# Altium PCB ESC.PcbDoc (part 2 of 2)
Units mm, origin at the board's own origin, x right, y up, seen from the top; angles counter-clockwise.
Board outline 33 x 33 mm, 4 copper layers (Top Layer, Layer 2, Layer 3, Bottom Layer), stack 0.603 mm thick; 138 components, 119 nets, 637 pads, 195 vias.
Unrouted connection lines stored in the file: 127.
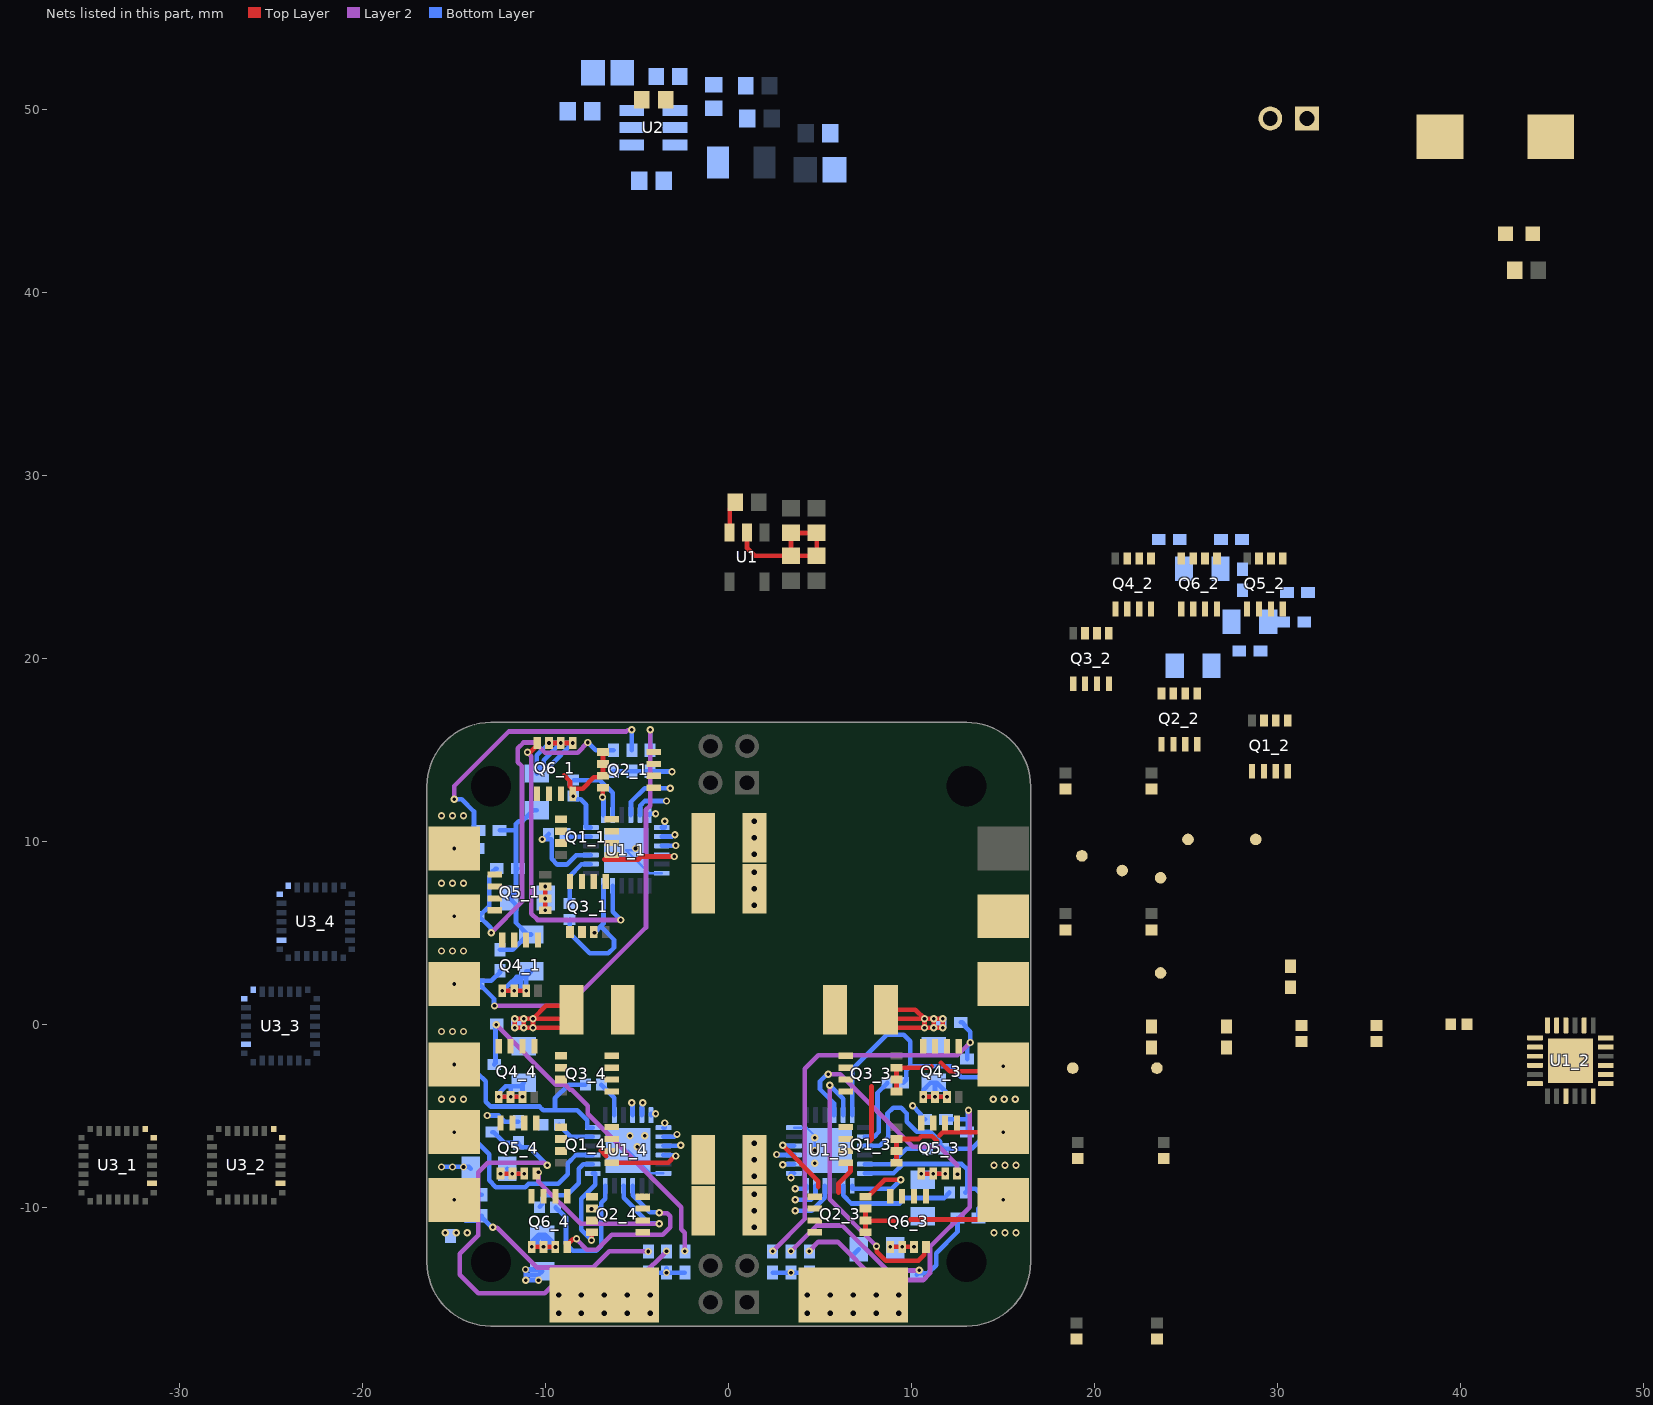
[diagram p4: the nets of this part, all layers, seen from the top]

## Via types
v1: diameter 0.4, hole 0.2, Top Layer to Bottom Layer, tented both sides, 163 vias
v2: diameter 0.55, hole 0.3, Top Layer to Bottom Layer, tented both sides, 32 vias

## Nets (pads, with @x,y where several pads share a name; then routed paths per layer and width w, separated by ;. In a path a pad name is that pad's centre, name@x,y a point inside that pad or via, vN(x,y) a via of type N, cw(c..) or ccw(c..) an arc to the next point about the centre after c; other vN are vias at no path point) (continued)
G2_L_3: Q5_3.4 U1_3.10 | length 12.4
  Top Layer w0.254: Q5_3.4@12.475,-8.17 12.5,-8.195 v1(12.5,-8.2)
  Layer 2 w0.254: v1(5.437,-2.737) 6.091,-2.737 10.055,-6.7 11.5,-6.7 12.472,-7.672 12.472,-8.172 v1(12.5,-8.2)
  Bottom Layer w0.254: v1(5.437,-2.737) 5.397,-2.737 5.329,-2.805 5.294,-2.805 4.985,-3.114 4.985,-3.55 5.75,-4.315 U1_3.10@5.75,-4.965
G2_L_4: Q5_4.4 U1_4.10 | length 11.4
  Top Layer w0.254: Q5_4.4@-10.525,-8.17 -10.455,-8.1 v1(-10.4,-8.1)
  Layer 2 w0.254: v1(-10.4,-8.1) -10.4,-8.6 -8.1,-10.9 v1(-3.8,-10.9)
  Bottom Layer w0.254: U1_4.10@-5.75,-8.835 -5.742,-8.843 -5.742,-9.493 -4.363,-10.872 -3.828,-10.872 v1(-3.8,-10.9)
G3_H_1: Q2_1.4 U1_1.19 | length 1.5
  Top Layer w0.254: v1(-6.9,12.4) -6.885,12.415 -6.885,12.91 Q2_1.4@-6.87,12.925
  Bottom Layer w0.254: v1(-6.9,12.4) -6.9,12.36 -6.85,12.31 U1_1.19@-6.85,11.435
G3_H_2: Q2_2.4 U1_2.13
G3_H_3: Q2_3.4 U1_3.19 | length 5.3
  Top Layer w0.254: Q2_3.4@7.47,-9.425 7.59,-9.425 8.515,-8.5 v1(9.4,-8.5)
  Bottom Layer w0.254: U1_3.19@6.75,-8.835 6.75,-9 8.9,-9 v1(9.4,-8.5)
G3_H_4: Q2_4.4 U1_4.13 | length 4.8
  Top Layer w0.254: v1(-7.5,-11.8) -7.485,-11.785 -7.485,-11.39 Q2_4.4@-7.47,-11.375
  Bottom Layer w0.254: v1(-7.5,-11.8) -8.067,-11.233 -8.067,-9.545 -7.304,-8.782 -7.304,-8.158 -7.312,-8.15 U1_4.13@-7.435,-8.15
G3_L_1: Q6_1.4 U1_1.11 | length 16.8
  Top Layer w0.254: v1(-10.997,14.869) -10.969,14.897 -10.828,14.897 -10.475,15.25 Q6_1.4@-10.475,15.37
  Layer 2 w0.254: v1(-10.997,14.869) -10.997,14.845 -10.8,14.647 -10.8,6.047 -10.451,5.698 -5.902,5.698 v1(-5.9,5.7)
  Bottom Layer w0.254: U1_1.11@-6.35,7.565 -6.35,6.15 v1(-5.9,5.7)
G3_L_2: Q6_2.4 U1_2.9
G3_L_3: Q6_3.4 U1_3.11 | length 15.5
  Top Layer w0.254: v1(8.073,-12.127) 8.083,-12.138 8.083,-12.431 8.583,-12.93 10.367,-12.93 10.692,-12.605 10.692,-12.253 Q6_3.4@10.775,-12.17
  Layer 2 w0.254: v1(5.512,-3.332) 5.512,-9.567 v1(8.073,-12.127)
  Bottom Layer w0.254: v1(5.512,-3.332) 6.25,-4.07 U1_3.11@6.25,-4.965
G3_L_4: Q6_4.4 U1_4.9 | length 10.3
  Top Layer w0.254: Q6_4.4@-8.825,-12.17 -8.825,-12.05 -8.526,-11.751 -8.351,-11.751 v1(-8.323,-11.723)
  Layer 2 w0.254: v1(-8.323,-11.723) -8.323,-11.762 -7.758,-12.327 -7.227,-12.327 -6.4,-11.5 -3.6,-11.5 -3.2,-11.1 -3.2,-10.5 -3.372,-10.328 -3.772,-10.328 v1(-3.8,-10.3)
  Bottom Layer w0.254: U1_4.9@-5.25,-8.835 -5.242,-8.843 -5.242,-9.351 -4.321,-10.272 -3.828,-10.272 v1(-3.8,-10.3)
GND: C1.2 C2.1 C3.1 C4.1 C5.1 C6.1 C7.2 C8.2 C9.1 C12.1 C13.1 C14.1 C15.2 C16_1.1 C16_2.1 C16_3.1 C16_4.1 C17_1.1 C17_2.1 C17_3.1 C17_4.1 C18.1 C19.1 D1.2 P1.1 pad.2@6.8,-14.8 R1_1.1 R1_2.1 R1_3.1 R1_4.1 R2_1.1 R2_2.1 R2_3.1 R2_4.1 R3_1.1 R3_2.1 R3_3.1 R3_4.1 R6.1 R10_1.1 R10_2.1 R10_3.1 R10_4.1 R11_1.1 R11_2.1 R11_3.1 R11_4.1 R12_1.1 R12_2.1 R12_3.1 R12_4.1 U1.2 U1_1.6 U1_1.25 U1_2.6 U1_2.25 U1_3.6 U1_3.25 U1_4.6 U1_4.25 U2.1 U3_1.16 U3_2.16 U3_3.16 U3_4.16 | length 59.4
  Top Layer w0.254: U1.2@1,26.875 1,26.025 1.425,25.6 C9.1@3.4,25.6 ; v2(1.4,-8.3) v2(1.4,-7.4) v2(1.4,-6.5) ; v1(-11.2,-0.2) v1(-11.2,0.3) ; v1(-11.2,-0.2) v1(-10.7,-0.2) ; v1(-11.2,-0.2) v1(-11.7,-0.2) v1(-11.7,0.3) v1(-11.2,0.3) ; v1(-11.2,0.3) v1(-10.7,0.3) ; v1(-10.7,-0.2) -9.123,-0.2 -8.6,0.323 C18.1@-8.6,0.8 ; v1(-10.7,-0.2) v1(-10.7,0.3) ; v1(-10.7,0.3) -9.1,0.3 C18.1@-8.6,0.8 ; v1(-10.7,0.3) -10,1 -8.8,1 C18.1@-8.6,0.8 ; C9.1@3.4,25.6 C6.1@3.4,26.85 C7.2@4.8,26.85 C8.2@4.8,25.6 C9.1@3.4,25.6 ; C19.1@8.6,0.8 10.2,0.8 v1(10.7,0.3) ; C19.1@8.6,0.8 8.6,0.323 9.123,-0.2 v1(10.7,-0.2) ; C19.1@8.6,0.8 9.1,0.3 v1(10.7,0.3) ; v1(10.7,-0.2) v1(10.7,0.3) ; v1(10.7,-0.2) v1(11.2,-0.2) ; v1(10.7,0.3) v1(11.2,0.3) ; v1(11.2,-0.2) v1(11.7,-0.2) v1(11.7,0.3) v1(11.2,0.3) ; v1(11.2,-0.2) v1(11.2,0.3)
  Bottom Layer w0.127: U1_4.25@-5.5,-6.9 -4.259,-8.141 -3.574,-8.141 U1_4.6@-3.565,-8.15 ; v1(-5.1,9.6) -5.2,9.5 U1_1.25@-5.6,9.5 -4.359,8.259 -3.674,8.259 U1_1.6@-3.665,8.25 ; U1_3.6@3.565,-5.65 3.574,-5.659 4.259,-5.659 4.7,-6.1 v1(4.7,-6.2) ; U1_3.25@4.616,-6.284 4.7,-6.367 v1(4.7,-6.9)
  Bottom Layer w0.254: v1(-15.7,-7.8) v1(-15.1,-7.8) v1(-14.5,-7.8) -14.2,-7.8 R2_4.1@-14.1,-7.9 ; v1(-13.2,-4.988) -12.585,-4.988 -12.248,-5.325 R11_4.1@-11.5,-5.325 ; R12_1.1@-12.525,10.6 -11.625,10.6 ; R10_1.1@-12.5,4.075 -11.8,4.075 R1_1.1@-10.975,4.9 ; R11_1.1@-11.625,8.5 -11.625,10.6 ; R11_1.1@-11.525,8.5 -11.625,8.4 -11.625,7.597 -11.627,7.595 -11.627,7.273 R2_1.1@-12,6.9 -11.627,6.527 -11.627,5.552 R1_1.1@-10.975,4.9 ; R1_1.1@-10.8,4.9 R1_1.1@-10.975,4.9 ; R3_1.1@-10.5,11.7 -10.675,11.7 -11.276,11.099 -11.476,11.099 -11.625,10.95 -11.625,10.6 ; v1(-10.4,-14) v1(-11.1,-14) -11.105,-13.995 -11.105,-13.705 ; R3_3.1@6.8,-12.7 6.8,-12.6 R3_3.1@7.1,-12.3 ; v1(10.047,-4.456) 10.477,-4.886 10.477,-5.027 10.65,-5.2 R11_3.1@10.725,-5.2 ; -11.105,-13.705 -11.105,-13.415 v1(-11.11,-13.41) -10.29,-13.41 R3_4.1@-10.2,-13.5 -10.405,-13.705 -11.105,-13.705
  other v1: -15.5,-11.4 -14.9,-11.4 -14.3,-11.4 14.5,-11.4 15.1,-11.4 15.7,-11.4 14.5,-7.7 15.1,-7.7 15.7,-7.7 4.7,-7.6 -5,-6.7 -5.4,-6.1 -4.6,-6.1 -15.7,-4.1 -15.1,-4.1 -14.5,-4.1 14.46,-4.1 15.06,-4.1 15.66,-4.1 -15.7,-0.4 -15.1,-0.4 -14.5,-0.4 -15.7,4 -15.1,4 -14.5,4 -15.7,7.7 -15.1,7.7 -14.5,7.7 -15.7,11.4 -15.1,11.4 -14.5,11.4
  other v2: 4.3,-15.8 5.55,-15.8 6.8,-15.8 8.05,-15.8 9.3,-15.8 4.3,-14.8 5.55,-14.8 6.8,-14.8 8.05,-14.8 9.3,-14.8 1.4,-11.1 1.4,-10.2 1.4,-9.3 1.4,6.5 1.4,7.4 1.4,8.3 1.4,9.3 1.4,10.2 1.4,11.1
NetC1_1_1: C1_1.1 U1_1.14 | length 2.9
  Bottom Layer w0.254: C1_1.1@-8.7,6.6 -8.7,8.093 -8.051,8.742 -7.543,8.742 U1_1.14@-7.535,8.75
NetC1_2_1: C1_2.1 U1_2.20
NetC1_3_1: C1_3.1 U1_3.14 | length 3.8
  Bottom Layer w0.254: U1_3.14@7.435,-6.15 7.443,-6.142 7.951,-6.142 8.2,-5.893 8.2,-4.867 8.128,-4.794 8.128,-3.752 8.66,-3.22 C1_3.1@8.66,-3.2
NetC1_4_1: C1_4.1 U1_4.20 | length 2
  Bottom Layer w0.254: C1_4.1@-6.96,-3.3 -6.96,-3.32 -6.25,-4.03 U1_4.20@-6.25,-4.965
NetC2_1_1: C2_1.1 U1_1.17 | length 1.5
  Bottom Layer w0.254: C2_1.1@-8.96,10.4 -8.81,10.25 U1_1.17@-7.535,10.25
NetC2_2_1: C2_2.1 U1_2.17
NetC2_3_1: C2_3.1 U1_3.17 | length 3.8
  Bottom Layer w0.254: U1_3.17@7.435,-7.65 8.863,-7.65 9.713,-6.8 C2_3.1@10.86,-6.8
NetC2_4_1: C2_4.1 U1_4.17 | length 2.1
  Bottom Layer w0.254: C2_4.1@-9.26,-5.5 -9.26,-5.52 -8.63,-6.15 U1_4.17@-7.435,-6.15
NetC3_1_1: C3_1.1 U1_1.20 | length 3.6
  Bottom Layer w0.254: C3_1.1@-8.48,13.34 -7.04,13.34 -6.35,12.65 U1_1.20@-6.35,11.435
NetC3_2_1: C3_2.1 U1_2.14
NetC3_3_1: C3_3.1 U1_3.20 | length 6.8
  Bottom Layer w0.254: U1_3.20@6.25,-8.835 6.258,-8.843 6.258,-9.351 6.705,-9.798 9.335,-9.798 9.633,-9.5 11.78,-9.5 12.06,-9.22 C3_3.1@12.06,-9.2
NetC3_4_1: C3_4.1 U1_4.14 | length 4.5
  Bottom Layer w0.254: C3_4.1@-10.336,-9.976 -10.187,-9.827 -10.187,-9.502 -10.039,-9.353 -8.853,-9.353 -8.192,-8.692 -8.192,-7.899 -7.951,-7.658 -7.443,-7.658 U1_4.14@-7.435,-7.65
NetC10_1: C10.1 L1.1 U2.2
NetC10_2: C10.2 U2.6
NetC11_1: C11.1 R3.1 R5.2 R6.2
NetD1_1: D1.1 R1.2
NetQ4_1_1: Q4_1.1 Q4_1.2 Q4_1.3 R1_1.2 | length 8.2
  Top Layer w0.254: v1(-12.375,1.83) v1(-11.725,1.83) v1(-11.075,1.83)
  Bottom Layer w0.254: v1(-12.375,1.83) v1@-12.335,1.83 ; R1_1.2@-11.075,2.9 R1_1.2@-11.075,2.8 ; v1@-12.335,1.83 v1(-11.725,1.83) ; v1@-12.335,1.83 -11.988,2.178 ; -11.988,2.178 -11.6,2.565 -11.6,2.6 R1_1.2@-11.275,2.6 ; -11.988,2.178 -11.697,2.178 ; v1(-11.725,1.83) -11.354,1.83 ; v1(-11.725,1.83) -11.697,1.858 -11.697,2.178 ; -11.697,2.178 R1_1.2@-11.348,2.527 ; -11.354,1.83 v1(-11.075,1.83) R1_1.2@-11.075,2.625 ; -11.354,1.83 -11.354,2.346 -11.348,2.352 R1_1.2@-11.348,2.527 ; R1_1.2@-11.348,2.527 R1_1.2@-11.275,2.6 ; R1_1.2@-11.275,2.6 -11.1,2.6 R1_1.2@-11.075,2.625 ; R1_1.2@-11.275,2.6 R1_1.2@-11.075,2.8 ; R1_1.2@-11.075,2.625 R1_1.2@-11.075,2.8 ; R1_1.2@-11.075,2.625 R1_1.2@-10.8,2.9 -10.975,2.9 R1_1.2@-11.075,2.8
NetQ4_2_1: Q4_2.1 Q4_2.2 Q4_2.3 R1_2.2
NetQ4_3_1: Q4_3.1 Q4_3.2 Q4_3.3 R1_3.2 | length 5.7
  Top Layer w0.254: v1(10.625,-3.97) v1(11.275,-3.97) v1(11.925,-3.97)
  Bottom Layer w0.254: R1_3.2@11.2,-3.2 11.375,-3.2 11.897,-3.722 11.897,-3.942 v1(11.925,-3.97) v1(11.275,-3.97) ; R1_3.2@11.2,-3.2 11.025,-3.2 10.652,-3.573 10.652,-3.943 v1(10.625,-3.97) v1(11.275,-3.97) ; R1_3.2@11.2,-3.2 11.275,-3.275 v1(11.275,-3.97)
NetQ4_4_1: Q4_4.1 Q4_4.2 Q4_4.3 R1_4.2 | length 5.7
  Top Layer w0.254: v1(-12.575,-3.97) v1(-11.925,-3.97) v1(-11.275,-3.97)
  Bottom Layer w0.254: R1_4.2@-11.2,-3.2 R1_4.2@-11.275,-3.275 ; v1(-11.925,-3.97) v1(-12.575,-3.97) -12.547,-3.942 -12.547,-3.747 -12.2,-3.4 -11.9,-3.4 ; v1(-11.925,-3.97) v1(-11.275,-3.97) R1_4.2@-11.275,-3.275 ; v1(-11.925,-3.97) -11.925,-3.425 -11.9,-3.4 ; -11.9,-3.4 -11.4,-3.4 R1_4.2@-11.275,-3.275
NetQ5_1_1: Q5_1.1 Q5_1.2 Q5_1.3 R2_1.2 | length 1.3
  Top Layer w0.254: v1(-10.03,6.225) v1(-10.03,6.875) v1(-10.03,7.525)
NetQ5_2_1: Q5_2.1 Q5_2.2 Q5_2.3 R2_2.2
NetQ5_3_1: Q5_3.1 Q5_3.2 Q5_3.3 R2_3.2 | length 2.6
  Top Layer w0.254: v1(10.525,-8.17) v1(11.175,-8.17) v1(11.825,-8.17)
  Bottom Layer w0.254: v1(10.525,-8.17) v1(11.175,-8.17) v1(11.825,-8.17)
NetQ5_4_1: Q5_4.1 Q5_4.2 Q5_4.3 R2_4.2 | length 2.3
  Top Layer w0.254: v1(-12.475,-8.17) v1(-11.825,-8.17) v1(-11.175,-8.17)
  Bottom Layer w0.254: R2_4.2@-12.1,-7.9 -11.83,-8.17 v1(-11.175,-8.17)
NetQ6_1_1: Q6_1.1 Q6_1.2 Q6_1.3 R3_1.2 | length 9.3
  Top Layer w0.254: v1(-9.825,15.37) v1(-9.175,15.37) v1(-8.525,15.37)
  Bottom Layer w0.254: R3_1.2@-10.5,14.045 R3_1.2@-10.155,14.045 ; R3_1.2@-10.5,14.045 R3_1.2@-10.5,13.7 R3_1.2@-10.155,14.045 ; R3_1.2@-10.5,14.045 -10.5,14.695 v1(-9.825,15.37) v1(-9.175,15.37) ; R3_1.2@-10.155,14.045 -10.141,14.045 R3_1.2@-10.113,14.073 ; R3_1.2@-10.155,14.045 -10.127,14.073 R3_1.2@-10.113,14.073 ; R3_1.2@-10.113,14.073 -9.827,14.073 -9.8,14.1 -9.795,14.1 v1(-8.525,15.37) v1(-9.175,15.37) ; R3_1.2@-10.113,14.073 -10.113,14.432 v1(-9.175,15.37)
NetQ6_2_1: Q6_2.1 Q6_2.2 Q6_2.3 R3_2.2
NetQ6_3_1: Q6_3.1 Q6_3.2 Q6_3.3 R3_3.2 | length 1.4
  Top Layer w0.254: Q6_3.1@8.825,-12.29 v1(8.825,-12.17) v1(9.475,-12.17) v1(10.125,-12.17)
NetQ6_4_1: Q6_4.1 Q6_4.2 Q6_4.3 R3_4.2 | length 7
  Top Layer w0.254: v1(-10.775,-12.17) v1(-10.125,-12.17) Q6_4.3@-9.475,-12.17 ; v1(-9.468,-12.177) Q6_4.3@-9.475,-12.17 ; v1(-9.468,-12.177) Q6_4.3@-9.475,-12.17
  Bottom Layer w0.254: v1(-9.468,-12.177) v1@-9.472,-12.174 ; -10.45,-12.17 -10.45,-11.75 R3_4.2@-10.2,-11.5 ; -10.45,-12.17 v1(-10.125,-12.17) ; -10.45,-12.17 v1(-10.775,-12.17) -10.748,-12.143 -10.748,-11.873 -10.375,-11.5 R3_4.2@-10.2,-11.5 ; R3_4.2@-10.2,-11.5 R3_4.2@-10.169,-11.5 ; R3_4.2@-10.2,-11.5 -10.125,-11.575 v1(-10.125,-12.17) ; R3_4.2@-10.169,-11.5 -10.025,-11.5 -9.496,-12.029 -9.496,-12.149 v1@-9.472,-12.174 ; R3_4.2@-10.169,-11.5 -9.796,-11.873 -9.796,-12.174 ; v1(-10.125,-12.17) -10.121,-12.174 -9.796,-12.174 ; -9.796,-12.174 v1@-9.472,-12.174
NetR2_1: R2.1 U1.3 | length 1.8
  Top Layer w0.254: U1.3@0.05,26.875 0.05,28.175 0.35,28.475 R2.1@0.35,28.525
NetR4_1: R4.1 U2.5
NetR5_1: R5.1 U2.4
NetU1_1_1: U1_1.1 | length 0.5
  Bottom Layer w0.254: U1_1.1@-3.665,10.75 -3.508,10.75 -3.5,10.758 v1(-3.5,11.1)
NetU1_1_2: U1_1.2 | length 0.8
  Bottom Layer w0.254: U1_1.2@-3.665,10.25 -3.657,10.258 -3.087,10.258 -2.983,10.362 v1(-2.943,10.362)
NetU1_1_3: U1_1.3 | length 0.8
  Bottom Layer w0.254: U1_1.3@-3.665,9.75 -3.658,9.757 -2.904,9.757 v1(-2.897,9.764)
NetU1_1_22: U1_1.22 | length 3.2
  Bottom Layer w0.254: U1_1.22@-5.35,11.435 -5.342,11.443 -5.342,12.158 -4.6,12.9 v1(-3.2,12.9)
NetU1_1_23: U1_1.23 | length 2.1
  Bottom Layer w0.254: U1_1.23@-4.85,11.435 -4.842,11.443 -4.842,11.951 -4.593,12.2 v1(-3.4,12.2)
NetU1_1_24: U1_1.24 | length 0.4
  Bottom Layer w0.254: U1_1.24@-4.35,11.435 -4.35,11.492 -4.342,11.5 v1(-4,11.5)
NetU1_2_1: U1_2.1
NetU1_2_2: U1_2.2
NetU1_2_3: U1_2.3
NetU1_2_22: U1_2.22
NetU1_2_23: U1_2.23
NetU1_2_24: U1_2.24
NetU1_3_1: U1_3.1 | length 0.4
  Bottom Layer w0.254: v1(3.4,-8.4) 3.4,-8.158 3.408,-8.15 U1_3.1@3.565,-8.15
NetU1_3_2: U1_3.2 | length 0.6
  Bottom Layer w0.254: v1(2.945,-7.677) 2.964,-7.658 3.557,-7.658 U1_3.2@3.565,-7.65
NetU1_3_3: U1_3.3 | length 1
  Bottom Layer w0.254: v1(2.614,-7.123) 2.641,-7.15 U1_3.3@3.565,-7.15
NetU1_3_22: U1_3.22 | length 2.6
  Bottom Layer w0.254: v1(3.627,-10.2) 4.535,-10.2 5.242,-9.493 5.242,-8.843 U1_3.22@5.25,-8.835
NetU1_3_23: U1_3.23 | length 1.7
  Bottom Layer w0.254: v1(3.627,-9.6) 4.493,-9.6 4.742,-9.351 4.742,-8.843 U1_3.23@4.75,-8.835
NetU1_3_24: U1_3.24 | length 0.8
  Bottom Layer w0.254: v1(3.627,-9) 4.242,-9 4.25,-8.992 U1_3.24@4.25,-8.835
NetU1_4_1: U1_4.1 | length 0.3
  Bottom Layer w0.254: U1_4.1@-3.565,-5.65 -3.508,-5.65 -3.5,-5.642 v1(-3.5,-5.4)
NetU1_4_2: U1_4.2 | length 0.8
  Bottom Layer w0.254: U1_4.2@-3.565,-6.15 -3.557,-6.142 -2.986,-6.142 -2.867,-6.023 v1(-2.827,-6.023)
NetU1_4_3: U1_4.3 | length 0.9
  Bottom Layer w0.254: U1_4.3@-3.565,-6.65 -3.557,-6.642 -2.647,-6.642 v1(-2.628,-6.623)
NetU1_4_22: U1_4.22 | length 0.7
  Bottom Layer w0.254: v1(-5.3,-4.3) -5.3,-4.34 -5.258,-4.382 -5.258,-4.957 U1_4.22@-5.25,-4.965
NetU1_4_23: U1_4.23 | length 0.7
  Bottom Layer w0.254: U1_4.23@-4.75,-4.965 -4.742,-4.957 -4.742,-4.382 -4.7,-4.34 v1(-4.7,-4.3)
NetU1_4_24: U1_4.24 | length 0.3
  Bottom Layer w0.254: U1_4.24@-4.25,-4.965 -4.25,-4.908 -4.242,-4.9 v1(-4,-4.9)
OUT1_1: C1_1.2 pad.1@-15,2.2 Q3_1.1 Q3_1.2 Q3_1.3 Q4_1.5 Q4_1.6 Q4_1.7 Q4_1.8 R5_1.2 U1_1.12 | length 8
  Bottom Layer w0.254: C1_1.2@-8.7,5.72 -8.7,4.978 -7.595,3.873 -6.582,3.873 -6.273,4.182 -6.273,4.623 -6.992,5.343 ; v1(-7.335,5) -6.992,5.343 ; U1_1.12@-6.85,7.565 -6.85,5.485 -6.992,5.343
  other v1: -15,2.2
OUT1_2: C1_2.2 pad.2@15,5.9 Q3_2.1 Q3_2.2 Q3_2.3 Q4_2.5 Q4_2.6 Q4_2.7 Q4_2.8 R5_2.2 U1_2.18
OUT1_3: C1_3.2 pad.1@15,-2.2 Q3_3.1 Q3_3.2 Q3_3.3 Q4_3.5 Q4_3.6 Q4_3.7 Q4_3.8 R5_3.2 U1_3.12 | length 22.8
  Top Layer w0.254: Q3_3.1@9.17,-3.675 Q3_3.2@9.17,-3.025 Q3_3.3@9.17,-2.375 11.025,-2.375 11.1,-2.3 ; 11.6,-2.1 12.077,-2.577 14.623,-2.577 pad.1@15,-2.2 v1(15,-2.3)
  Bottom Layer w0.254: U1_3.12@6.75,-4.965 6.75,-2.45 8.627,-0.573 9.573,-0.573 9.926,-0.926 9.926,-2.274 9.9,-2.3 ; C1_3.2@9.54,-3.2 9.695,-3.045 9.695,-2.505 9.9,-2.3 ; R5_3.2@14.175,-1.9 14.348,-2.073 14.733,-2.073 14.96,-2.3 v1(15,-2.3) 14.4,-2.9 12.7,-2.9 12.1,-2.3 9.9,-2.3
OUT1_4: C1_4.2 pad.1@-15,-2.2 Q3_4.1 Q3_4.2 Q3_4.3 Q4_4.5 Q4_4.6 Q4_4.7 Q4_4.8 R5_4.2 U1_4.18 | length 12.7
  Bottom Layer w0.254: v1(-15,-2.2) -14.438,-2.2 -14.025,-2.2 -14,-2.225 R5_4.2@-13.975,-2.2 -13.908,-2.2 -13.735,-2.373 -13.735,-2.665 -13.273,-3.127 -13.273,-4.227 -13,-4.5 -10.345,-4.5 -10.145,-4.7 -9.5,-4.7 ; C1_4.2@-7.84,-3.3 -8.745,-3.3 -9.5,-4.055 -9.5,-4.7 ; U1_4.18@-7.435,-5.65 -7.73,-5.65 -7.738,-5.642 -7.738,-5.242 -8.28,-4.7 -9.5,-4.7
OUT2_1: C2_1.2 pad.3@-15,5.9 Q1_1.1 Q1_1.2 Q1_1.3 Q5_1.5 Q5_1.6 Q5_1.7 Q5_1.8 R7_1.2 U1_1.15 | length 4.3
  Bottom Layer w0.254: v1(-10.2,10.1) -9.706,10.1 -9.673,10.067 -9.673,9.036 -9.364,8.727 -8.861,8.727 -8.346,9.242 -7.543,9.242 U1_1.15@-7.535,9.25 ; C2_1.2@-10.013,10.207 -9.84,10.38 C2_1.2@-9.84,10.4
  other v1: -15,5.9
OUT2_2: C2_2.2 pad.1@15,2.2 Q1_2.1 Q1_2.2 Q1_2.3 Q5_2.5 Q5_2.6 Q5_2.7 Q5_2.8 R7_2.2 U1_2.15
OUT2_3: C2_3.2 pad.2@15,-5.9 Q1_3.1 Q1_3.2 Q1_3.3 Q5_3.5 Q5_3.6 Q5_3.7 Q5_3.8 R7_3.2 U1_3.15 | length 18.3
  Top Layer w0.254: Q1_3.1@9.17,-7.575 Q1_3.3@9.17,-6.275 10.381,-6.275 10.529,-6.127 11.127,-6.127 11.4,-6.4 ; 11.5,-6.1 11.7,-5.9 v1(15,-5.9)
  Bottom Layer w0.254: U1_3.15@7.435,-6.65 8.246,-6.65 8.72,-6.176 8.72,-5.365 8.673,-5.318 8.673,-4.882 8.982,-4.573 9.418,-4.573 9.727,-4.882 9.727,-5.339 10.27,-5.882 11.024,-5.882 11.567,-6.425 11.567,-6.627 C2_3.2@11.74,-6.8 13.275,-6.8 13.927,-6.148 13.927,-6.073 14.1,-5.9 v1(15,-5.9)
OUT2_4: C2_4.2 pad.2@-15,-5.9 Q1_4.1 Q1_4.2 Q1_4.3 Q5_4.5 Q5_4.6 Q5_4.7 Q5_4.8 R7_4.2 U1_4.15 | length 11.1
  Bottom Layer w0.254: v1(-15,-5.9) -14.008,-5.9 -13.835,-6.073 -13.835,-6.365 -13.5,-6.7 -13.1,-7.1 -13.1,-8.537 -12.735,-8.902 -11.119,-8.902 -10.944,-8.727 -9.327,-8.727 -8.8,-8.2 -8.8,-7.6 -8.35,-7.15 U1_4.15@-7.435,-7.15 ; R7_4.2@-14.3,-5.867 -14.108,-5.867 R7_4.2@-14.075,-5.9
OUT3_1: C3_1.2 pad.3@-15,9.6 Q2_1.1 Q2_1.2 Q2_1.3 Q6_1.5 Q6_1.6 Q6_1.7 Q6_1.8 R9_1.2 U1_1.18 | length 7.4
  Top Layer w0.254: -9,13.6 -8.678,13.278 -8.678,12.983 -8.568,12.873 -8.568,12.528 v1(-8.5,12.46) -8.5,12.855 -8.482,12.873 -7.988,12.873 -7.369,13.492 -6.953,13.492 Q2_1.3@-6.87,13.575 Q2_1.2@-6.87,14.225 Q2_1.1@-6.87,14.875
  Bottom Layer w0.254: v1(-15,9.6) R9_1.2@-14.95,9.6 ; v1(-8.5,12.46) -8.327,12.287 -8.087,12.287 -7.8,12 -7.8,10.758 -7.792,10.75 U1_1.18@-7.535,10.75
OUT3_2: C3_2.2 Q2_2.1 Q2_2.2 Q2_2.3 Q6_2.5 Q6_2.6 Q6_2.7 Q6_2.8 R9_2.2 U1_2.12
OUT3_3: C3_3.2 pad.3@15,-9.6 Q2_3.1 Q2_3.2 Q2_3.3 Q6_3.5 Q6_3.6 Q6_3.7 Q6_3.8 R9_3.2 U1_3.18 | length 19.1
  Top Layer w0.254: Q2_3.1@7.47,-11.375 Q2_3.3@7.47,-10.075 ; Q2_3.2@7.47,-10.735 9.065,-10.735 ; 9.9,-10.7 9.927,-10.673 13.927,-10.673 v1(15,-9.6)
  Bottom Layer w0.254: U1_3.18@7.435,-8.15 9.005,-8.15 9.512,-7.643 12.743,-7.643 13.027,-7.927 13.027,-9.113 C3_3.2@12.94,-9.2 ; C3_3.2@13.05,-8.995 13.495,-8.995 14.1,-9.6 ; R9_3.2@13.65,-10.6 13.65,-10.05 14.1,-9.6 ; v1(15,-9.6) 14.1,-9.6
OUT3_4: C3_4.2 pad.3@-15,-9.6 Q2_4.1 Q2_4.2 Q2_4.3 Q6_4.5 Q6_4.6 Q6_4.7 Q6_4.8 R9_4.2 U1_4.12 | length 10
  Bottom Layer w0.254: v1(-15,-9.6) -14.96,-9.6 -14.685,-9.325 R9_4.2@-13.5,-9.325 ; C3_4.2@-9.46,-10 -9.46,-10.02 -9.287,-10.193 -9.267,-10.193 -8.9,-10.56 -8.9,-12 -8.527,-12.373 -7.249,-12.373 -6.973,-12.097 -6.973,-10.1 ; v1(-7.5,-10.1) -7.472,-10.072 -7.001,-10.072 -6.973,-10.1 ; U1_4.12@-6.75,-8.835 -6.75,-9.53 -6.973,-9.753 -6.973,-10.1
SNS_U_1: R4_1.2 R5_1.1 R10_1.2 | length 25.3
  Layer 2 w0.254: v1(-12.8,1) -8.813,1 -4.527,5.286 -4.527,11.718 -4.3,11.945 v1(-4.3,16.1)
  Bottom Layer w0.254: v1(-12.8,1) -12.828,1.028 -12.828,1.378 -13.65,2.2 R5_1.1@-13.725,2.2 -13.552,2.373 -12.977,2.373 -12.5,2.85 R10_1.2@-12.5,2.925 ; R4_1.2@-4.3,14.975 v1(-4.3,16.1)
SNS_U_2: R4_2.2 R5_2.1 R10_2.2
SNS_U_3: R4_3.2 R5_3.1 R10_3.2 | length 22.7
  Layer 2 w0.254: v1(2.4,-12.4) 4.154,-10.646 4.154,-2.446 4.9,-1.7 12.5,-1.7 v1(13.2,-1)
  Bottom Layer w0.254: R10_3.2@12.675,0.1 12.75,0.1 12.923,-0.073 12.923,-0.148 13.194,-0.419 13.194,-0.994 v1(13.2,-1) 13.2,-1.04 13.025,-1.215 R5_3.1@13.025,-1.9
SNS_U_4: R4_4.2 R5_4.1 R10_4.2 | length 19.3
  Layer 2 w0.254: v1(-12.712,-0.037) -9.45,-3.3 -8.949,-3.3 -8.676,-3.573 -8.582,-3.573 -7.7,-4.455 -7.7,-4.9 -2.6,-10 -2.6,-11.2 -2.4,-11.4 v1(-2.4,-12.4)
  Bottom Layer w0.254: R5_4.1@-12.825,-2.2 -12.75,-2.125 -12.75,-0.075 v1(-12.712,-0.037) R10_4.2@-12.675,0 ; R4_4.2@-2.4,-12.425 v1(-2.4,-12.4)
SNS_V_1: R6_1.2 R7_1.1 R11_1.2 | length 21.2
  Layer 2 w0.254: v1(-12.985,5) -11.3,6.685 -11.3,14.1 -11.524,14.324 -11.524,15.087 -11.216,15.396 -10.596,15.396 -10.043,14.843 -8.257,14.843 v1(-7.7,15.4)
  Bottom Layer w0.254: R7_1.1@-13.725,5.9 R7_1.1@-13.65,5.9 ; v1(-12.985,5) -13.013,5.028 -13.013,5.263 R7_1.1@-13.65,5.9 ; R11_1.2@-12.675,8.5 -12.75,8.5 -12.923,8.327 -12.923,8.252 -13.1,8.075 -13.1,6.45 R7_1.1@-13.65,5.9 ; v1(-7.7,15.4) -7.275,14.975 R6_1.2@-6.3,14.975
SNS_V_2: R6_2.2 R7_2.1 R11_2.2
SNS_V_3: R6_3.2 R7_3.1 R11_3.2 | length 20.1
  Layer 2 w0.254: v1(4.4,-12.4) 4.9,-11.9 5.956,-11.9 8.039,-13.983 10.626,-13.983 11,-13.609 11,-12.172 13.172,-10 13.172,-4.875 13.128,-4.831 13.128,-4.728 v1(13.1,-4.7)
  Bottom Layer w0.254: R6_3.2@4.4,-12.425 v1(4.4,-12.4) ; R11_3.2@11.875,-5.2 13.072,-5.2 ; R7_3.1@13.025,-5.9 13.072,-5.853 13.072,-5.2 ; v1(13.1,-4.7) 13.072,-4.728 13.072,-5.2
SNS_V_4: R6_4.2 R7_4.1 R11_4.2 | length 26.5
  Layer 2 w0.254: v1(-9.927,-7.7) -9.967,-7.7 -10.094,-7.573 -13.173,-7.573 -13.7,-8.1 -13.7,-11.545 -14.7,-12.545 -14.7,-13.7 -13.7,-14.7 -10.051,-14.7 -9.151,-13.8 -4.8,-13.8 v1(-3.4,-12.4)
  Bottom Layer w0.254: R7_4.1@-12.925,-5.9 -12.85,-5.9 -12.275,-6.475 R11_4.2@-11.5,-6.475 -11.5,-6.55 -11.327,-6.723 -10.904,-6.723 v1(-9.927,-7.7) ; R6_4.2@-3.4,-12.425 v1(-3.4,-12.4)
SNS_W_1: R8_1.2 R9_1.1 R12_1.2 | length 16.3
  Layer 2 w0.254: v1(-15,12.3) -15,13.018 -12.018,16 -5.6,16 -5.528,16.072 -5.328,16.072 v1(-5.3,16.1)
  Bottom Layer w0.254: v1(-15,12.3) -14.6,12.3 -13.923,11.623 -13.923,10.773 -13.75,10.6 -13.725,10.6 R9_1.1@-13.725,9.6 ; R8_1.2@-5.3,14.975 v1(-5.3,16.1)
SNS_W_2: R8_2.2 R9_2.1 R12_2.2
SNS_W_3: R8_3.2 R9_3.1 R12_3.2 | length 12.9
  Layer 2 w0.254: v1(3.4,-12.4) 4.8,-11 6.2,-11 8.657,-13.457 10.406,-13.457 v1(10.408,-13.456)
  Bottom Layer w0.254: R12_3.2@10.275,-13.7 10.357,-13.618 10.882,-13.618 11.338,-13.162 11.338,-12.512 12.5,-11.35 R9_3.1@12.5,-10.6
SNS_W_4: R8_4.2 R9_4.1 R12_4.2 | length 12.6
  Layer 2 w0.254: v1(-12.9,-11.1) -12.872,-11.128 -12.647,-11.128 -10.475,-13.3 -7.425,-13.3 -6.525,-12.4 -4.425,-12.4 v1(-4.4,-12.425)
  Bottom Layer w0.254: R12_4.2@-15.2,-10.425 -15.027,-10.598 -14.519,-10.598 -14.392,-10.725 -13.675,-10.725 -13.5,-10.55 -12.978,-11.072 -12.928,-11.072 v1(-12.9,-11.1) ; R9_4.1@-13.5,-10.517 R9_4.1@-13.5,-10.475
SNS_X_1: R4_1.1 R6_1.1 R8_1.1 | length 3.2
  Bottom Layer w0.254: R6_1.1@-6.3,13.825 R8_1.1@-5.3,13.825 R4_1.1@-4.3,13.825 -4.287,13.812 -3.112,13.812 v1(-3.1,13.8)
SNS_X_2: R4_2.1 R6_2.1 R8_2.1
SNS_X_3: R4_3.1 R6_3.1 R8_3.1 | length 2
  Bottom Layer w0.254: R4_3.1@2.4,-13.575 v1(3.4,-13.575) R6_3.1@4.4,-13.575
SNS_X_4: R4_4.1 R6_4.1 R8_4.1 | length 2.2
  Bottom Layer w0.254: R8_4.1@-4.4,-13.575 v1(-3.4,-13.575) ; R6_4.1@-3.4,-13.35 v1(-3.4,-13.575) ; R4_4.1@-2.4,-13.575 v1(-3.4,-13.575)
SWCLK_1: TP2_1.1 U3_1.22
SWCLK_2: TP2_2.1 U3_2.22
SWCLK_3: TP2_3.1 U3_3.22
SWCLK_4: TP2_4.1 U3_4.22
SWDIO_1: TP1_1.1 U3_1.21
SWDIO_2: TP1_2.1 U3_2.21
SWDIO_3: TP1_3.1 U3_3.21
SWDIO_4: TP1_4.1 U3_4.21
VBAT: C1.1 C2.2 C3.2 C4.2 C5.2 C14.2 C15.1 C18.2 C19.2 P1.2 pad.2@-6.8,-14.8 Q1_1.5 Q1_1.6 Q1_1.7 Q1_1.8 Q1_2.5 Q1_2.6 Q1_2.7 Q1_2.8 Q1_3.5 Q1_3.6 Q1_3.7 Q1_3.8 Q1_4.5 Q1_4.6 Q1_4.7 Q1_4.8 Q2_1.5 Q2_1.6 Q2_1.7 Q2_1.8 Q2_2.5 Q2_2.6 Q2_2.7 Q2_2.8 Q2_3.5 Q2_3.6 Q2_3.7 Q2_3.8 Q2_4.5 Q2_4.6 Q2_4.7 Q2_4.8 Q3_1.5 Q3_1.6 Q3_1.7 Q3_1.8 Q3_2.5 Q3_2.6 Q3_2.7 Q3_2.8 Q3_3.5 Q3_3.6 Q3_3.7 Q3_3.8 Q3_4.5 Q3_4.6 Q3_4.7 Q3_4.8 R4.2 U1_1.4 U1_2.4 U1_3.4 U1_4.4 U2.3 | length 21.2
  Top Layer w0.254: v2(-9.3,-15.8) -8.3,-14.8 v2(-6.8,-14.8) ; -7,-6.9 -6.692,-7.208 ; -6.8,9 -4.955,9 -4.786,9.169 v1(-2.973,9.169) ; Q1_4.5@-6.4,-7.575 -3.315,-7.575 -2.94,-7.2 v1(-2.9,-7.2) ; v1(2.945,-6.623) 4.9,-8.578 4.9,-8.9 ; 6,-9.2 6,-8.7 6.657,-8.043 6.657,-7.618 6.614,-7.575 Q1_3.8@6.4,-7.575 ; 7.7,-6.4 7.8,-6.3 7.8,-3.4
  Bottom Layer w0.127: U1_1.4@-3.665,9.25 -3.624,9.209 -3.014,9.209 v1(-2.973,9.169)
  Bottom Layer w0.254: U1_4.4@-3.565,-7.15 -3.557,-7.158 -2.982,-7.158 -2.94,-7.2 v1(-2.9,-7.2) ; v1(2.945,-6.623) 2.964,-6.642 3.557,-6.642 U1_3.4@3.565,-6.65
  other v2: -8.05,-15.8 -6.8,-15.8 -5.55,-15.8 -4.3,-15.8 -9.3,-14.8 -8.05,-14.8 -5.55,-14.8 -4.3,-14.8
pads on no net: P2.1 P2.2 P2.3 P2.4 P3.1 P3.2 P3.3 P3.4 U1.4 U1_1.5 U1_1.7 U1_1.8 U1_1.21 U1_2.5 U1_2.7 U1_2.8 U1_2.21 U1_3.5 U1_3.7 U1_3.8 U1_3.21 U1_4.5 U1_4.7 U1_4.8 U1_4.21 U3_1.1 U3_1.2 U3_1.3 U3_1.4 U3_1.6 U3_1.7 U3_1.8 U3_1.9 U3_1.10 U3_1.11 U3_1.12 U3_1.13 U3_1.14 U3_1.15 U3_1.18 U3_1.19 U3_1.20 U3_1.23 U3_1.24 U3_1.25 U3_1.26 U3_1.27 U3_1.28 U3_2.1 U3_2.2 U3_2.3 U3_2.4 U3_2.6 U3_2.7 U3_2.8 U3_2.9 U3_2.10 U3_2.11 U3_2.12 U3_2.13 U3_2.14 U3_2.15 U3_2.18 U3_2.19 U3_2.20 U3_2.23 U3_2.24 U3_2.25 U3_2.26 U3_2.27 U3_2.28 U3_3.1 U3_3.2 U3_3.3 U3_3.4 U3_3.6 U3_3.7 U3_3.8 U3_3.9 U3_3.10 U3_3.11 U3_3.12 U3_3.13 U3_3.14 U3_3.15 U3_3.18 U3_3.19 U3_3.20 U3_3.23 U3_3.24 U3_3.25 U3_3.26 U3_3.27 U3_3.28 U3_4.1 U3_4.2 U3_4.3 U3_4.4 U3_4.6 U3_4.7 U3_4.8 U3_4.9 U3_4.10 U3_4.11 U3_4.12 U3_4.13 U3_4.14 U3_4.15 U3_4.18 U3_4.19 U3_4.20 U3_4.23 U3_4.24 U3_4.25 U3_4.26 U3_4.27 U3_4.28

## Polygon pours and split planes (outlines as drawn)
OUT3_4 on Top Layer "PolygonDirect" (solid, pour order 8): -7.1,-11 -7.1,-9.2 -8.2,-9.2 -8.6,-8.8 -13,-8.8 -13.4,-8.4 -15,-8.4 -15,-10.7 -14.9,-10.8 -12.2,-10.8 -11.7,-11.3 -8.2,-11.3 -7.9,-11
OUT2_4 on Top Layer "PolygonDirect" (solid, pour order 9): -8.8,-7.2 -8.8,-5.4 -9.815,-5.4 -10.1,-5.115 -10.515,-4.7 -13.7,-4.7 -13.7,-7.1 -13.2,-7.1 -13.1,-7.2
OUT2_3 on Top Layer "PolygonDirect" (solid, pour order 15): 8.8,-7.8 8.8,-6 9.6,-6 10.1,-5.5 10.1,-5.115 10.515,-4.7 13.7,-4.7 13.7,-7.1 13.1,-7.1 12.7,-7.5 9.9,-7.5 9.6,-7.8
OUT3_1 on Top Layer "PolygonDirect" (solid, pour order 4): -6.5,15.2 -7.2,15.2 -7.9,14.5 -11,14.5 -14.7,10.8 -15.5,10.8 -15.5,8.4 -13.6,8.4 -10,12 -8.3,12 -8.1,12.2 -8.1,12.8 -7.6,13.3 -6.5,13.3
OUT2_1 on Top Layer "PolygonDirect" (solid, pour order 3): -8.7,11.5 -10.3,11.5 -13.6,8.2 -14.8,7 -14.8,4.7 -13.5,4.7 -12.8,5.4 -11.2,5.4 -10.8,5.8 -10.8,8.5 -9.8,9.5 -8.7,9.5
OUT1_1 on Top Layer "PolygonDirect" (solid, pour order 2): -7.1,5.4 -10.4,5.4 -10.6,5.2 -12.6,5.2 -13.6,4.2 -14.6,3.2 -14.6,1 -13.5,1 -13.2,1.3 -11.9,2.6 -9.8,2.6 -8.3,4.1 -7.7,4.1 -7.1,4.7
OUT1_4 on Top Layer "PolygonDirect" (solid, pour order 10): -8.8,-3.3 -8.8,-1.5 -10.1,-1.5 -10.2,-1.4 -10.2,-0.8 -10.4,-0.6 -12.8,-0.6 -13.2,-1 -14.7,-1 -14.7,-3.4 -13.4,-3.4 -13.3,-3.3 -10.1,-3.3
OUT3_3 on Top Layer "PolygonDirect" (solid, pour order 12): 7.1,-11.6 7.1,-9.8 7.9,-9.8 8.2,-9.5 8.2,-9.2 8.6,-8.8 13,-8.8 13.4,-8.4 14.9,-8.4 14.9,-10.8 12.2,-10.8 11.6,-11.4 8.7,-11.4 8.5,-11.6
OUT1_3 on Top Layer "PolygonDirect" (solid, pour order 13): 8.8,-3.9 8.8,-2.1 9.5,-2.1 10.2,-1.4 10.2,-0.8 10.4,-0.6 12.8,-0.6 13.2,-1 14.7,-1 14.7,-3.4 13.4,-3.4 13.3,-3.3 10.1,-3.3 9.5,-3.9
VBAT on Top Layer "Top" (solid, shelved, pour order 16): -17.2,16.4 -17.2,-16.7 17.5,-16.7 17.5,16.4
GND on Layer 2 "NONET_L02_P005" (solid, shelved, pour order 5): -17.2,16.4 -17.2,-16.7 17.5,-16.7 17.5,16.4
GND on Layer 3 "NONET_L03_P006" (solid, shelved, pour order 6): -17.2,16.4 -17.2,-16.7 17.5,-16.7 17.5,16.4
GND on Bottom Layer "NONET_L04_P000" (solid, shelved, pour order 0): -17.2,16.4 -17.2,-16.7 17.5,-16.7 17.5,16.4

## Silkscreen, mask and mechanical layers (free items; w line width, h text height)
Top Overlay:
  circle w0.44: c-13,13 r1.31
  circle w0.44: c13,-13 r1.31
  circle w0.44: c-13,-13 r1.31
  circle w0.44: c13,13 r1.31
Bottom Overlay:
  circle w0.44: c-13,13 r1.31
  circle w0.44: c13,-13 r1.31
  circle w0.44: c-13,-13 r1.31
  circle w0.44: c13,13 r1.31
Board:
  the board outline again, w0.127